# Altium PCB STM32&ESP.PcbDoc
Units mm, origin at the board's own origin, x right, y up, seen from the top; angles counter-clockwise.
Board outline 84.67 x 73.97 mm, 2 copper layers (Top Layer, Bottom Layer); 55 components, 54 nets, 237 pads, 41 vias.
Unrouted connection lines stored in the file: 4.
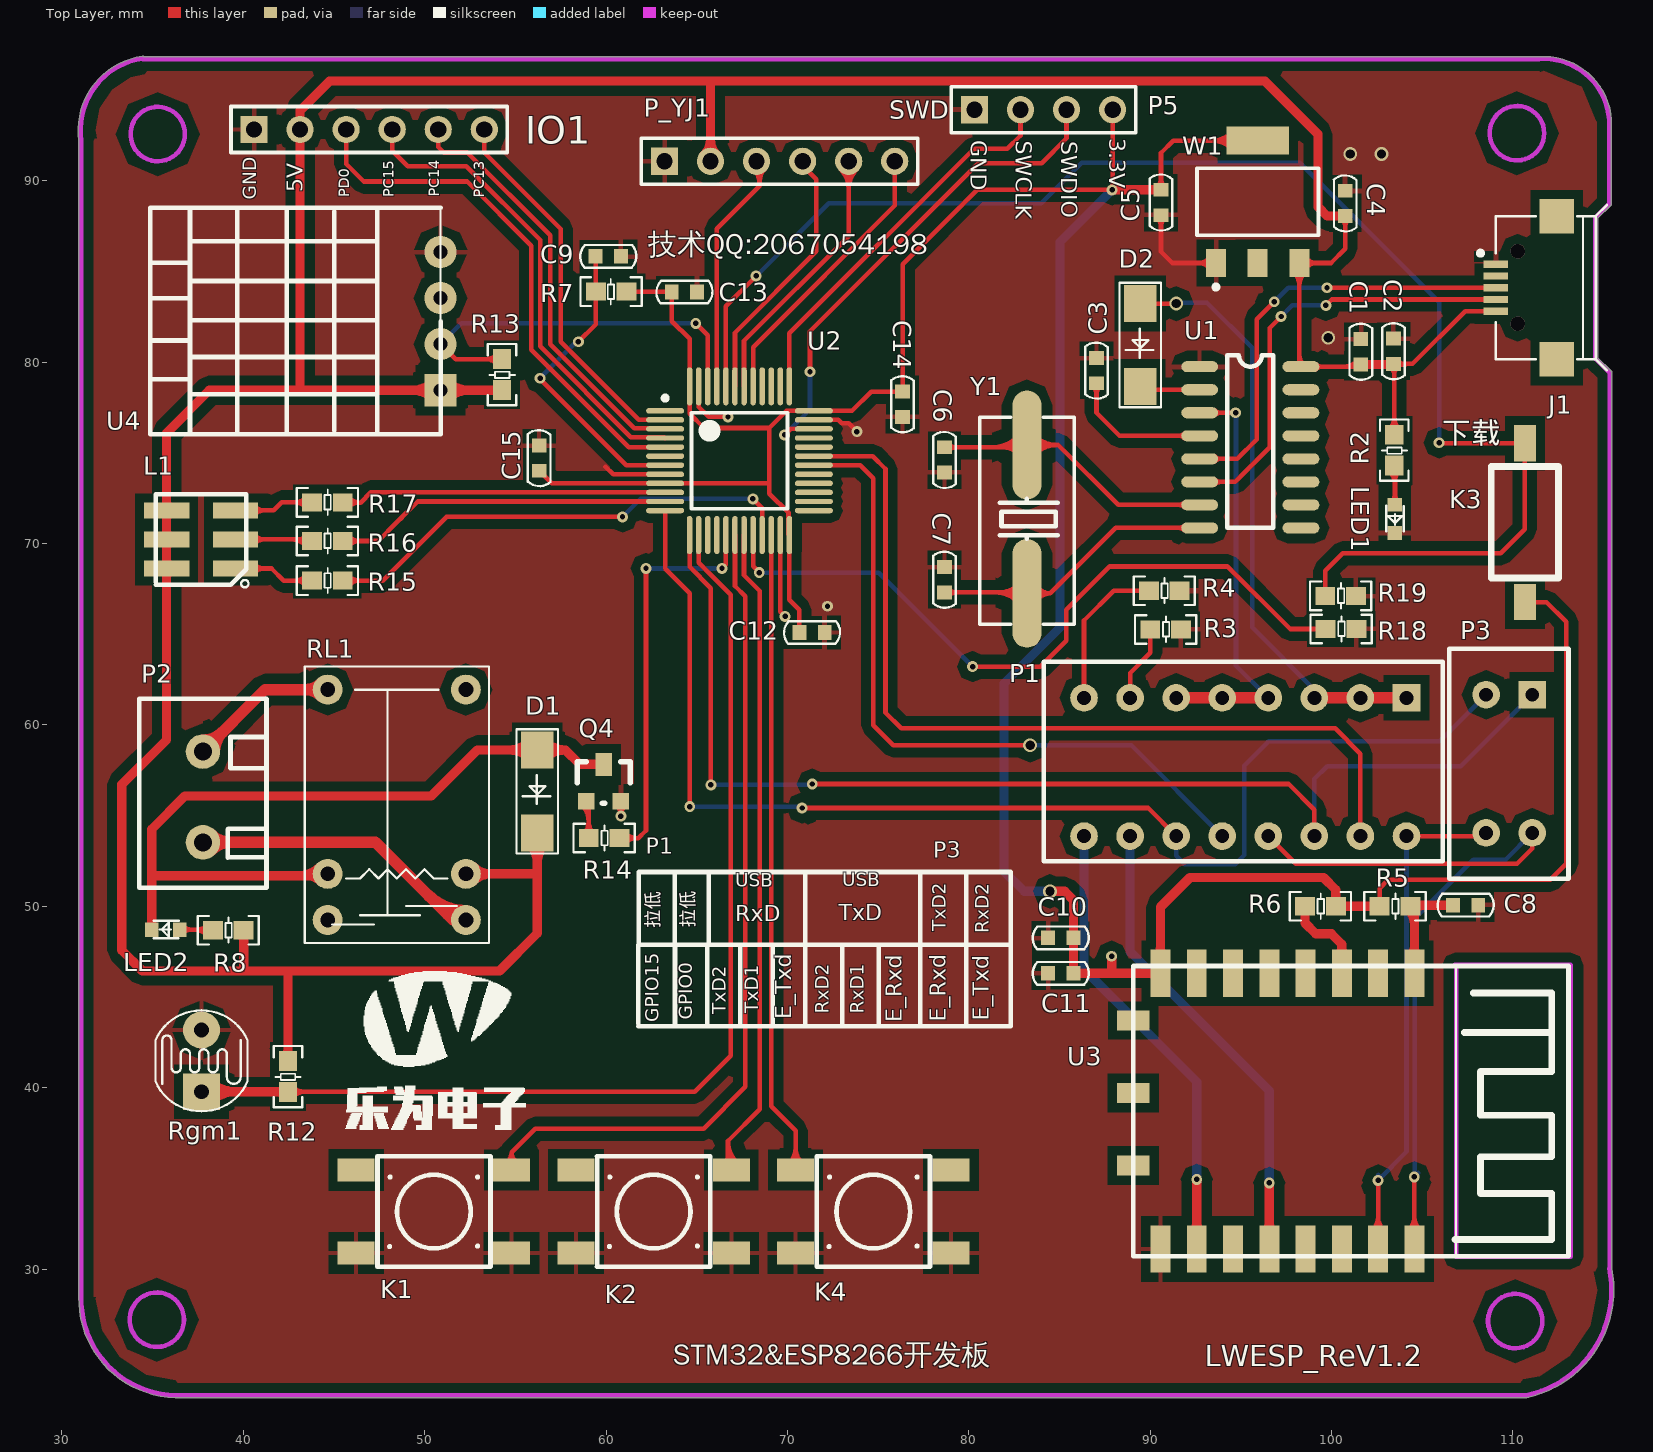
[diagram p0: Top Layer view]
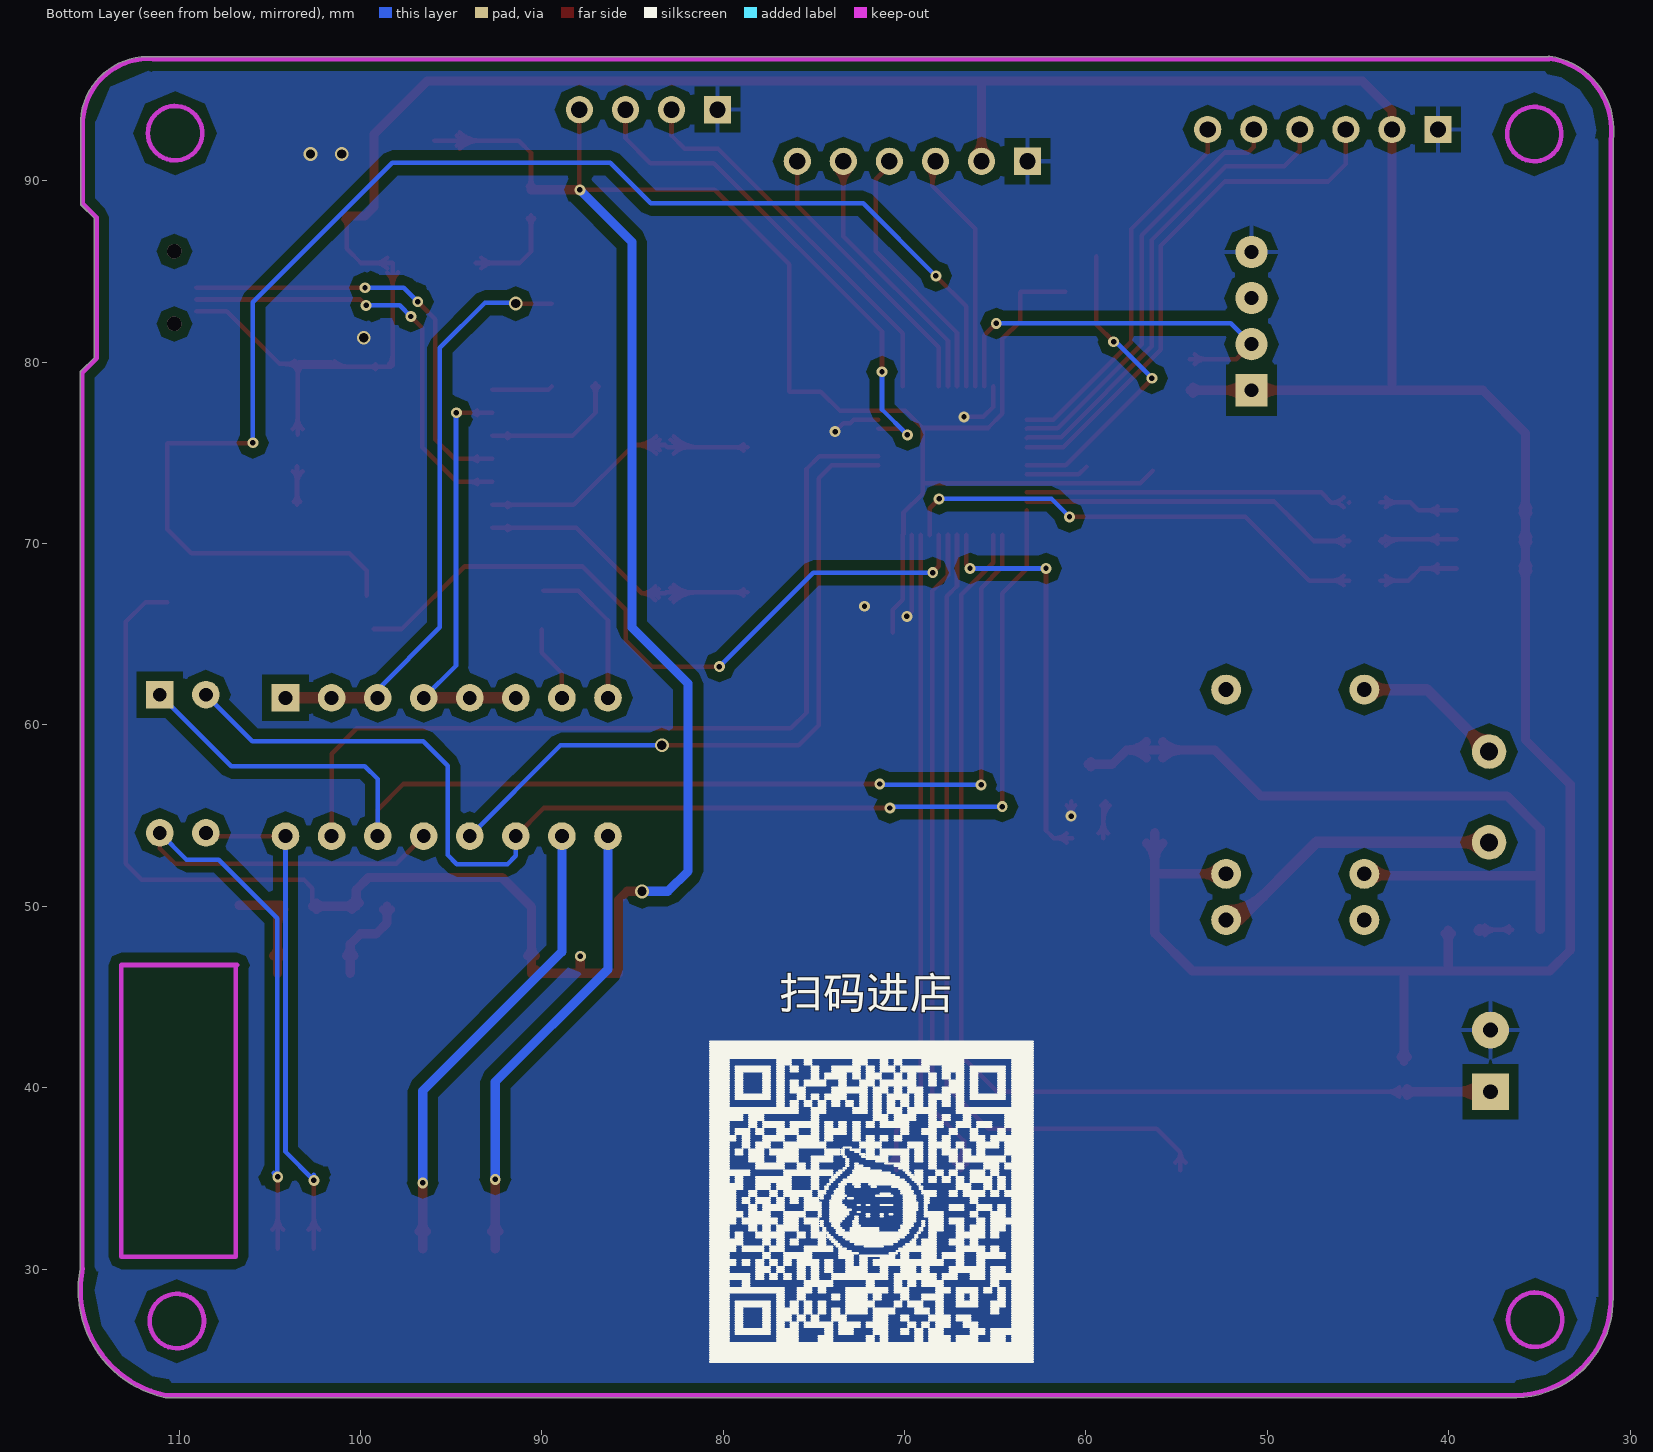
[diagram p1: Bottom Layer view, seen from below]

## Layer stack, top to bottom
Top Layer: signal copper 0.0356
Dielectric: dielectric 0.32, FR-4, Dk 4.8
Bottom Layer: signal copper 0.0356

## Board outline
36.243,22.91 ccw(c36.246,23.038) 36.246,22.91 110.744,22.91 ccw(c110.744,23.038) 110.77,22.913 ccw(c109.525,28.829) 115.57,28.829 ccw(c109.525,28.829) 115.453,30.013 ccw(c115.341,30.074) 115.469,30.074 115.469,79.426 ccw(c115.341,79.426) 115.431,79.516 114.681,80.266 114.681,87.933 115.406,88.658 115.406,88.657 ccw(c115.316,88.748) 115.443,88.748 115.443,93.37 ccw(c115.316,93.37) 115.443,93.379 ccw(c111.709,93.116) 111.451,96.851 34.519,96.851 ccw(c34.442,96.749) 34.424,96.875 ccw(c35.014,92.799) 30.937,92.218 30.937,28.475 cw(c36.373,28.346) 30.937,28.476 30.937,28.475 ccw(c36.373,28.346)

## Design rules (kind name [scope] priority, off if disabled: settings)
Clearance Clearance_1 [inpolygon] p1: gap=0.508
Clearance [All] p2: gap=0.178
ComponentClearance [All] p1 off: gap=0.254 collisioncheckmode=3 verticalgap=0.254 showdistances=FALSE
PolygonConnect PolygonConnect_1 [isvia] p1: connectstyle=Direct reliefconductorwidth=0.254 reliefentries=4 polygonreliefangle="90 Angle"
PolygonConnect [All] p2: connectstyle=Relief reliefconductorwidth=0.254 reliefentries=4 polygonreliefangle="90 Angle"
RoutingVias [All] p1: holewidth=12.7 width=12.7 viastyle="Through Hole" minholewidth=0.381 minwidth=0.762 maxholewidth=12.7 maxwidth=12.7
SilkscreenOverComponentPads [All] p1: minsilkscreentomaskgap=0.254
SolderMaskExpansion [All] p1: expansion=0.102
TestPointUsage [All] p1: valid=0 allowmultiple=FALSE
Testpoint [All] p1: side=3 testpointundercomponent=TRUE minsize=1.016 maxsize=2.54 preferedsize=1.524 minholesize=0 maxholesize=1.016 preferedholesize=0.813 testpointgrid=0.025 style=297 order=0-112345678
Width [All] p1: maxlimit=0.635 minlimit=0.203 preferedwidth=0.254
22 further rules are at their usual default settings.

## Components (designator, comment, footprint, x,y, rotation, side; value= is the part's Value field where it differs from the comment)
C1 "Cap" SC0603 101.625,81.28 r270 top
C2 "Cap" SC0603 103.429,81.305 r270 top
C3 "Cap" SC0603 87.046,78.842 r90 top
C4 "Cap" SC0603 100.762,89.459 r270 top
C5 "Cap" SC0603 90.602,88.113 r90 top
C6 "Cap" SC0603 78.664,75.311 r270 top
C7 "Cap" SC0603 78.664,67.31 r90 top
C8 "104/50V" SC0603 106.705,50.063 r0 top
C9 "104" SC0603 59.426,85.841 r0 top
C10 "104/50V" SC0603 85.776,48.26 r180 top
C11 "106/50V" SC0603 85.776,46.304 r180 top
C12 "104" SC0603 70.663,65.1 r0 top
C13 "104" SC0603 63.627,83.871 r0 top
C14 "104" SC0603 76.352,78.384 r270 top
C15 "104" SC0603 56.312,74.016 r90 top
D1 "二极管" SS12 56.21,53.924 r90 top
D2 "1N4148" SS12 89.459,78.537 r90 top
IO1 "Header 6" HDR1X6 40.589,92.837 r0 top
J1 "Micro USB" "micro usb" 112.42,88.062 r180 top
K1 "key按键" SW-T 54.254,31.14 r90 top
K2 "key按键" SW-T 66.37,31.14 r90 top
K3 "下载按键" "轻触开关 3*6*2.5mm" 112.522,68.097 r90 top
K4 "key按键" SW-T 78.486,31.14 r90 top
L1 "G5050" G5050 37.668,70.231 r90 top
LED1 "发光二级管" G0603 103.505,72.136 r270 top
LED2 "发光二级管" G0603 36.5,48.717 r180 top
P1 "拨码开关" 拨码开关 104.14,61.493 r180 top
P2 "P" KF301-2P 41.275,51.029 r90 top
P3 "拨码开关2位" 拨码开关2位 111.074,61.671 r180 top
P5 "SWD" 4P 80.315,93.929 r0 top
P_YJ1 "Header 6" HDR1X6 63.221,91.084 r0 top
Q4 "S8050" SOT-23 58.928,55.804 r0 top
R2 "2K" 0603R 103.454,74.32 r90 top
R3 "100R" 0603R 91.694,65.253 r180 top
R4 "100R" 0603R 91.618,67.386 r180 top
R5 "1K" 0603R 104.343,49.987 r180 top
R6 "1K" 0603R 100.228,49.987 r180 top
R7 "1K" 0603R 59.452,83.91 r0 top
R8 "2K" 0603R 40.005,48.666 r180 top
R12 "10K" 0603R 42.443,39.776 r90 top
R13 "1K" 0603R 54.254,78.486 r90 top
R14 "1K" 0603R 60.731,53.746 r180 top
R15 "1K" 0603R 45.466,67.945 r180 top
R16 "1K" 0603R 45.466,70.129 r180 top
R17 "1K" 0603R 45.466,72.263 r180 top
R18 "1K" 0603R 101.371,65.278 r180 top
R19 "10K" 0603R 101.346,67.107 r180 top
Rgm1 "光敏电阻" pr 37.694,41.478 r270 top
RL1 "6脚继电器" 6脚继电器 47.193,56.871 r0 top
U1 "CH340G" MAX3232 91.618,70.434 r0 top
U2 "STM32F103C8T6" LQFP-48_M 67.386,74.803 r0 top
U3 "ESP-12F" ESP12F 88.951,30.836 r270 top
U4 "DHT11" DHT11 50.876,82.271 r180 top
W1 "AMS1117_3.3" AMS1117_3.3 96.012,88.875 r0 top
Y1 "XTAL" XTAX5 83.236,75.413 r270 top

## Footprints (in the part's own frame and the unit in brackets; to place one, negate y for a bottom-side part, rotate by r counter-clockwise, add the part's x,y. Pads: shape width x height; smd on the part's side, far side on the other; paste and mask are expansions set on the pad)
4P [mm]
  rect 1.5x1.5 hole 0.9: 1(0,0)
  round 1.5 hole 0.9: 2(2.54,0) 3(5.08,0) 4(7.62,0)
  silkscreen extent -1.27,-1.27 8.89,1.27
6脚继电器 [mil]
  round 65 hole 32: 1(-100,200) 2(-100,-300) 3(200,-300) 4(200,-200) 5(-100,-200) 6(200,200)
  silkscreen extent -150,-350 250,250
0603R [mm] "Chip Resistor; Body 1.6 x 0.8 mm (LxW typ)"
  rect 1.1x1 smd: 1(-0.016,-0.014) 2(1.684,-0.014)
  silkscreen extent -0.85,-0.8 2.52,0.77
AMS1117_3.3 [mm]
  rect 1.1x1.55 smd: 1(-2.376,-3.4) 2(-0.076,-3.4) 3(2.224,-3.4)
  rect 3.45x1.55 smd: 4(-0.076,3.35)
  silkscreen extent -3.43,-4.85 3.27,1.82
DHT11 [mil]
  rect 70x70 hole 30: 1(0,150)
  round 70 hole 30: 2(0,50) 3(0,-50) 4(0,-150)
  silkscreen extent 0,-246 630,246
ESP12F [mm]
  rect 2.6x1.1 smd: 1(-15.474,15.624) 2(-15.474,13.624) 3(-15.474,11.624) 4(-15.474,9.624) 5(-15.474,7.624) 6(-15.474,5.624) 7(-15.474,3.624) 8(-15.474,1.624) 15(-0.274,1.624) 16(-0.274,3.624) 17(-0.274,5.624) 18(-0.274,7.624) 19(-0.274,9.624) 20(-0.274,11.624) 21(-0.274,13.624) 22(-0.274,15.624)
  rect 1.1x1.8 smd: 9(-12.874,0.124) 11(-8.874,0.124) 13(-4.874,0.124)
  silkscreen extent -15.87,0.12 0.13,24.12
G0603 [mm]
  rect 0.75x0.8 smd: 1(0,0) 2(1.55,0)
  silkscreen extent 0.05,-0.48 1.45,0.48
G5050 [mm]
  rect 0.9x2.5 smd: 1(-1.6,-1.9) 2(0,-1.9) 3(1.6,-1.9) 4(1.6,1.9) 5(0,1.9) 6(-1.6,1.9)
  silkscreen extent -2.64,-2.62 2.5,2.5
HDR1X6 [mm] "Connector; Header; 6 Position"
  rect 1.5x1.5 hole 0.9: 1(0,0)
  round 1.5 hole 0.9: 2(2.54,0) 3(5.08,0) 4(7.62,0) 5(10.16,0) 6(12.7,0)
  silkscreen extent -1.27,-1.27 13.97,1.27, body extent -1.27,-1.27 13.97,1.27, height 7.58
KF301-2P [mm]
  round 1.9 hole 1: 1(2.5,3.5) 2(7.5,3.5)
  silkscreen extent 0,0 10.41,7.01
LQFP-48_M [mm]
  oval 2.1x0.3 smd: 1(-4.125,2.521) 2(-4.125,2.021) 3(-4.125,1.521) 4(-4.125,1.021) 5(-4.125,0.521) 6(-4.125,0.021) 7(-4.125,-0.479) 8(-4.125,-0.979) 9(-4.125,-1.479) 10(-4.125,-1.979) 11(-4.125,-2.479) 12(-4.125,-2.979) 25(4.075,-2.979) 26(4.075,-2.479) 27(4.075,-1.979) 28(4.075,-1.479) 29(4.075,-0.979) 30(4.075,-0.479) 31(4.075,0.021) 32(4.075,0.521) 33(4.075,1.021) 34(4.075,1.521) 35(4.075,2.021) 36(4.075,2.521)
  oval 0.3x2.1 smd: 13(-2.775,-4.329) 14(-2.275,-4.329) 15(-1.775,-4.329) 16(-1.275,-4.329) 17(-0.775,-4.329) 18(-0.275,-4.329) 19(0.225,-4.329) 20(0.725,-4.329) 21(1.225,-4.329) 22(1.725,-4.329) 23(2.225,-4.329) 24(2.725,-4.329) 37(2.725,3.871) 38(2.225,3.871) 39(1.725,3.871) 40(1.225,3.871) 41(0.725,3.871) 42(0.225,3.871) 43(-0.275,3.871) 44(-0.775,3.871) 45(-1.275,3.871) 46(-1.775,3.871) 47(-2.275,3.871) 48(-2.775,3.871)
  silkscreen extent -4.25,-2.88 2.62,3.35, body extent -3.53,-3.73 3.47,3.27, height 1.6
MAX3232 [mil]
  oval 80x24 smd: 1(44,367) 2(44,317) 3(44,267) 4(44,217) 5(44,167) 6(44,117) 7(44,67) 8(44,17) 9(264,17) 10(264,67) 11(264,117) 12(264,167) 13(264,217) 14(264,267) 15(264,317) 16(264,367)
  silkscreen extent 104,17 204,392
"micro usb" [mm]
  rect 1.35x0.4 smd: 1(3.358,5.25) 2(3.358,4.6) 3(3.358,3.95) 4(3.358,3.3) 5(3.358,2.65)
  rect 1.9x1.9 smd: ""(0,7.9) ""(0,0)
  silkscreen extent -2.78,-0.62 4.32,8.52
pr [mil]
  rect 80x80 hole 32: 1(66.93,0)
  round 80 hole 32: 2(-66.93,0)
  silkscreen extent -110,-100 110,100
SC0603 [mil]
  rect 30x32 smd: 1(0,0) 2(55,0)
  silkscreen extent -33,-25 88,25
SOT-23 [mil]
  rect 36x36 smd: 1(-0.46,-0.15) 2(74.54,-0.15)
  rect 36x50 smd: 3(37.54,79.85)
  silkscreen extent -20,-5 95,85
SS12 [mil]
  rect 80x70 smd: 1(185,0) 2(5,0)
  silkscreen extent -40,-45 230,45, body extent -6,-50 175,56, height 94
SW-T [mil]
  rect 50x80 smd: 1(-10.2,316.23) 1(-10.2,-21.27) 2(169.8,316.23) 2(169.8,-21.27)
  silkscreen extent -40,24 200,270
XTAX5 [mm]
  oval 6x1.6 smd: 1(8.153,-0.025) 2(-0.025,-0.025)
  silkscreen extent -1.55,-2.63 9.85,2.57, body extent -1.53,-2.34 9.82,2.31, height 3.5
拨码开关 [mil]
  rect 60x60 hole 30: 1(0,0)
  round 60 hole 30: 2(100,0) 3(200,0) 4(300,0) 5(400,0) 6(500,0) 7(600,0) 8(700,0) 9(700,300) 10(600,300) 11(500,300) 12(400,300) 13(300,300) 14(200,300) 15(100,300) 16(0,300)
  silkscreen extent -79,-79 787,354
拨码开关2位 [mil]
  rect 60x60 hole 30: 1(0,0)
  round 60 hole 30: 2(100,0) 3(0,300) 4(100,300)
  silkscreen extent -79,-100 180,400
"轻触开关 3*6*2.5mm" [mm]
  rect 2x1.2 smd: 1(-1.321,1.85) 2(7.442,1.85)
  silkscreen extent 0,0 6.15,3.71

## Part data
C1 C2 C3 C4 C5 C6 C7: "Capacitor"
C8 C10 C11: library part "Cap Semi", "Capacitor (Semiconductor SIM Model)"
C9 C12 C13 C14 C15: library part CAP, "Capacitor"
D2: library part 二极管
IO1 P_YJ1: "Header, 6-Pin"
K3: library part key按键
P2: library part 2P
P5: library part 4P
Q4: library part 三极管3
R2 R8: library part 电阻R
R3 R4 R5 R6 R12 R14 R15 R16 R17 R18 R19: library part RES0.2
R7 R13: library part RES0.4
Rgm1: library part Res-Sen
U2: library part stc15f2k60s2(32脚)
Y1: "Crystal Oscillator"

## Via types
v1: diameter 0.6, hole 0.3, Top Layer to Bottom Layer, 33 vias
v2: diameter 0.762, hole 0.508, Top Layer to Bottom Layer, 6 vias
v3: diameter 0.8, hole 0.8, Top Layer to Bottom Layer, 2 vias

## Nets (pads, with @x,y where several pads share a name; then routed paths per layer and width w, separated by ;. In a path a pad name is that pad's centre, name@x,y a point inside that pad or via, vN(x,y) a via of type N, cw(c..) or ccw(c..) an arc to the next point about the centre after c; other vN are vias at no path point)
3.3V: C5.2 C10.1 C11.1 C12.1 C13.1 C14.1 C15.1 K3.1 P5.4 R5.2 R6.1 R7.2 U2.9 U2.24 U2.36 U2.48 U3.8 W1.2 W1.4 | length 192.3
  Top Layer w0.254: C15.1 57.003,73.324 U2.9 69.006,73.324 69.012,73.33 ; R7.2 63.602,83.896 C13.1 63.627,82.271 64.611,81.287 U2.48 64.616,78.67 64.616,77.167 65.405,76.378 69.012,76.378 ; C12.1 70.663,66.345 70.111,66.897 U2.24 70.066,70.52 70.066,71.692 69.012,72.746 69.012,73.33 ; P5.4 87.935,89.535 v1(87.909,89.51) 80.467,89.51 76.352,85.395 C14.1 74.625,78.384 73.565,77.324 U2.36 71.456,77.32 69.954,77.32 69.012,76.378 ; C5.2@90.422,89.689 ccw(c89.989,90.123) 90.602,90.123 ccw(c91.215,90.123) C5.2@90.781,89.689 ; C5.2 90.602,91.542 91.284,92.224 W1.4 ; W1.4@94.528,91.766 ccw(c93.421,90.66) 93.421,92.224 ccw(c93.421,93.789) W1.4@94.528,92.682 ; W1.4@94.707,91.946 ccw(c94.035,91.273) 94.035,92.224 ccw(c94.035,93.175) W1.4@94.707,92.503 ; R5.2 102.659,50.995 103.124,51.46 112.065,51.46 112.954,52.349 112.954,65.684 111.862,66.777 K3.1 ; 69.012,73.33 69.012,76.378
  Top Layer w0.508: v2(84.48,50.825) 85.293,50.825 85.776,50.343 C10.1 C11.1 87.884,46.304 ; v1(87.884,47.244) 87.884,46.304 ; v1(87.909,89.51) C5.2 ; 89.847,46.304 ccw(c89.847,47.037) U3.8@90.365,46.519 ; 89.873,46.304 cw(c89.873,45.608) U3.8@90.365,46.1 ; U3.8@90.365,47.269 ccw(c89.86,47.774) 90.575,47.774 ccw(c91.289,47.774) U3.8@90.784,47.269 ; R6.1@100.07,50.175 ccw(c99.65,50.595) 100.244,50.595 ccw(c100.838,50.595) R6.1@100.418,50.175 ; R6.1@100.468,49.827 cw(c100.888,49.408) 100.888,50.001 cw(c100.888,50.595) R6.1@100.468,50.175 ; R5.2@102.435,49.827 ccw(c102.015,49.408) 102.015,50.001 ccw(c102.015,50.595) R5.2@102.435,50.175 ; R5.2 R6.1 100.244,50.911 99.568,51.587 92.202,51.587 90.575,49.96 U3.8 90.569,46.304 87.884,46.304
  Bottom Layer w0.508: v2(84.48,50.825) 83.058,50.825 81.94,51.943 81.94,62.281 85.039,65.38 85.039,86.639 v1(87.909,89.51) ; v1(87.884,47.244) v1@87.909,47.269
5V: C1.2 C2.2 C4.2 D1.2 IO1.2 J1.1 L1.4 L1.5 L1.6 P_YJ1.2 R2.2 R8.1 R12.2 R13.1 RL1.4 U1.16 U4.1 W1.3 | length 227.6
  Top Layer w0.254: W1.3@97.937,84.95 cw(c97.215,84.228) 98.236,84.228 cw(c99.257,84.228) W1.3@98.535,84.95 ; 98.236,80.397 ccw(c98.964,80.397) U1.16@98.449,79.882 ; W1.3@98.535,85.175 cw(c99.257,84.453) 99.257,85.474 cw(c99.257,86.495) W1.3@98.535,85.773 ; U1.16@99.16,79.63 cw(c99.464,79.327) 99.464,79.756 cw(c99.464,80.185) U1.16@99.16,79.882 ; C4.2@100.582,87.882 cw(c100.149,87.449) 100.762,87.449 cw(c101.375,87.449) C4.2@100.941,87.882 ; 100.68,79.756 ccw(c100.68,80.803) C1.2@101.42,80.063 ; C4.2 100.762,86.258 99.978,85.474 W1.3 98.236,79.844 U1.16 C1.2@101.498,79.756 ; R2.2@103.205,76.319 ccw(c102.568,76.955) 103.468,76.955 ccw(c104.369,76.955) R2.2@103.732,76.319 ; C2.2@103.275,79.729 cw(c102.807,79.261) 103.468,79.261 ; C2.2@103.454,79.883 C2.2 104.47,79.908 107.374,82.812 J1.1 ; R2.2 C2.2@103.468,79.869 ; 103.468,79.329 cw(c104.033,79.329) 103.634,79.729 cw(c104.006,79.357) 104.006,79.883 ; C2.2@103.634,80.088 ccw(c104.129,80.583) 104.129,79.883
  Top Layer w0.508: L1.6@35.63,68.492 cw(c35.295,68.158) 35.768,68.158 cw(c36.241,68.158) L1.6@35.907,68.492 ; L1.6@35.63,68.77 ccw(c35.295,69.104) 35.768,69.104 ccw(c36.241,69.104) L1.6@35.907,68.77 ; L1.5@35.63,70.092 cw(c35.295,69.758) 35.768,69.758 cw(c36.241,69.758) L1.5@35.907,70.092 ; L1.5@35.63,70.37 ccw(c35.295,70.704) 35.768,70.704 ccw(c36.241,70.704) L1.5@35.907,70.37 ; L1.4@35.63,71.692 cw(c35.295,71.358) 35.768,71.358 cw(c36.241,71.358) L1.4@35.907,71.692 ; L1.4@35.63,71.97 ccw(c35.295,72.304) 35.768,72.304 ccw(c36.241,72.304) L1.4@35.907,71.97 ; R8.1@39.847,48.507 cw(c39.427,48.087) 40.021,48.087 cw(c40.614,48.087) R8.1@40.195,48.507 ; R8.1 40.021,46.472 39.98,46.431 ; R12.2@42.284,41.685 ccw(c41.864,42.105) 42.458,42.105 ccw(c43.051,42.105) R12.2@42.632,41.685 ; R12.2 42.458,46.431 ; U4.1@50.427,78.012 ccw(c49.343,76.928) 49.343,78.461 ccw(c49.343,79.994) U4.1@50.427,78.91 ; U4.1@51.325,78.012 cw(c52.409,76.928) 52.409,78.461 cw(c52.409,79.994) U4.1@51.325,78.91 ; RL1.4 56.083,51.791 ; RL1.4@52.677,51.386 cw(c53.653,50.411) 53.653,51.791 cw(c53.653,53.17) RL1.4@52.677,52.195 ; 53.651,78.461 ccw(c53.651,79.088) R13.1@54.095,78.644 ; 53.698,78.461 cw(c53.698,77.9) R13.1@54.095,78.296 ; R13.1 54.259,78.461 U4.1 43.053,78.461 ; D1.2@55.761,53.475 cw(c54.677,52.391) 56.21,52.391 cw(c57.743,52.391) D1.2@56.659,53.475 ; D1.2 56.21,48.514 54.127,46.431 42.458,46.431 ; P_YJ1.2@65.41,91.435 ccw(c64.563,92.282) 65.761,92.282 ccw(c66.958,92.282) P_YJ1.2@66.111,91.435 ; P_YJ1.2 65.761,95.453 ; C4.2 99.771,88.062 99.263,88.57 99.263,92.583 96.342,95.504 44.755,95.504 43.129,93.878 IO1.2 43.129,78.537 43.053,78.461 ; C1.2 C2.2@103.403,79.883 ; 39.98,46.431 34.442,46.431 33.299,47.574 33.299,56.718 35.768,59.187 L1.6 L1.5 L1.4 35.768,76.103 38.125,78.461 43.053,78.461 ; 39.98,46.431 42.458,46.431
AD_GM: R12.1 Rgm1.1 U2.14 | length 64.7
  Top Layer w0.254: R12.1 42.475,39.778 64.899,39.778 66.878,41.757 66.878,67.183 65.111,68.95 U2.14 ; R12.1@42.721,39.497 cw(c43.4,38.818) 43.4,39.778 ; R12.1@42.721,40.025 ccw(c43.316,40.619) 43.316,39.778
  Top Layer w0.508: Rgm1.1 42.44,39.778 R12.1 ; Rgm1.1@38.232,39.239 cw(c39.533,37.939) 39.533,39.778 cw(c39.533,41.618) Rgm1.1@38.232,40.317 ; 41.822,39.778 cw(c41.822,39.125) R12.1@42.284,39.587 ; 41.906,39.778 ccw(c41.906,40.313) R12.1@42.284,39.935
D+: J1.3 U1.5 | length 26.7
  Top Layer w0.254: U1.5 94.818,74.676 95.885,75.743 95.885,82.372 v1(96.85,83.337) ; U1.5@93.572,74.55 cw(c93.876,74.247) 93.876,74.676 cw(c93.876,75.105) U1.5@93.572,74.802 ; v1@96.723,83.337 cw(c96.417,83.337) 96.633,83.121 cw(c96.85,82.904) v1@96.85,83.21 ; v1(99.758,84.112) J1.3 ; v1@99.848,84.022 cw(c100.065,83.805) 100.065,84.112 cw(c100.065,84.418) v1@99.848,84.202
  Bottom Layer w0.254: v1(96.85,83.337) 97.625,84.112 v1(99.758,84.112) ; v1@96.85,83.464 ccw(c96.85,83.771) 97.067,83.554 ccw(c97.284,83.337) v1@96.977,83.337 ; v1@99.668,84.022 ccw(c99.452,83.805) 99.452,84.112 ccw(c99.452,84.418) v1@99.668,84.202
D-: J1.2 U1.6 | length 26.5
  Top Layer w0.254: U1.6 94.691,73.406 96.596,75.311 96.596,81.89 v1(97.231,82.525) ; U1.6@93.572,73.28 cw(c93.876,72.977) 93.876,73.406 cw(c93.876,73.835) U1.6@93.572,73.532 ; v1@97.104,82.525 cw(c96.798,82.525) 97.014,82.308 cw(c97.231,82.091) v1@97.231,82.398 ; v1(99.695,83.134) 100.023,83.462 J1.2
  Bottom Layer w0.254: v1(97.231,82.525) 97.841,83.134 v1(99.695,83.134) ; v1@97.231,82.652 ccw(c97.231,82.958) 97.448,82.741 ccw(c97.665,82.525) v1@97.358,82.525 ; v1@99.605,83.044 ccw(c99.388,82.828) 99.388,83.134 ccw(c99.388,83.441) v1@99.605,83.224
ESP_RXD: P1.16 P3.4 U3.21 | length 30.4
  Top Layer w0.254: U3.21@102.276,32.159 ccw(c101.554,32.881) 102.575,32.881 ccw(c103.596,32.881) U3.21@102.874,32.159 ; v1@102.485,34.8 cw(c102.268,34.583) 102.575,34.583 cw(c102.881,34.583) v1@102.665,34.8 ; U3.21 v1(102.575,34.89) ; P1.16 108.356,53.873 P3.4
  Bottom Layer w0.254: v1@102.485,34.98 ccw(c102.268,35.197) 102.575,35.197 ccw(c102.881,35.197) v1@102.665,34.98 ; v1(102.575,34.89) 104.14,36.455 P1.16
ESP_TXD: P1.13 P3.3 U3.22 | length 45.6
  Top Layer w0.254: P1.13 98.044,52.349 110.236,52.349 111.074,53.188 P3.3 ; U3.22@104.276,32.159 ccw(c103.554,32.881) 104.575,32.881 ccw(c105.596,32.881) U3.22@104.874,32.159 ; v1@104.482,34.988 cw(c104.258,34.764) 104.575,34.764 ; U3.22 v1@104.575,35.074 ; v1@104.575,34.778 cw(c104.871,34.778) v1@104.662,34.988
  Bottom Layer w0.254: v1(104.572,35.077) 104.597,35.103 104.597,49.352 107.823,52.578 109.601,52.578 P3.3 ; v1@104.572,35.204 ccw(c104.572,35.511) 104.789,35.294 ccw(c105.005,35.077) v1@104.699,35.077
GND: C1.1 C2.1 C3.2 C4.1 C5.1 C6.2 C7.2 C8.2 C9.2 C10.2 C11.2 C12.2 C13.2 C14.2 C15.2 IO1.1 J1.5 K1.1 K2.1 K4.1 LED1.2 P5.1 P_YJ1.1 Q4.2 R3.1 R4.1 R18.1 R19.1 Rgm1.2 U1.1 U2.8 U2.23 U2.35 U2.47 U3.15 U4.4 W1.1 | length 24.1
  Top Layer w0.254: 59.969,74.244 60.389,73.824 U2.8 ; Q4.2@60.588,55.567 cw(c60.024,55.003) 60.821,55.003 cw(c61.619,55.003) Q4.2@61.055,55.567 ; v1@60.732,55.067 ccw(c60.515,55.284) 60.821,55.284 ccw(c61.128,55.284) v1@60.911,55.067 ; v1(60.821,54.977) Q4.2 ; U2.47 65.111,77.536 65.659,76.987 v1(66.726,76.987) ; U2.23 69.611,66.254 v1(69.875,65.989) ; U2.35 72.808,76.824 72.995,76.637 73.375,76.637 v1(73.838,76.175) ; C5.1@90.422,87.933 cw(c89.989,87.499) 90.602,87.499 cw(c91.215,87.499) C5.1@90.781,87.933 ; C5.1 90.602,86.106 91.234,85.474 W1.1 ; W1.1@93.337,85.175 ccw(c92.615,84.453) 92.615,85.474 ccw(c92.615,86.495) W1.1@93.337,85.773
  other v1: 72.212,66.548
  other v2: 99.822,81.356 101.041,91.491 102.768,91.491
GPIO15: P1.9 U3.16 | length 26.5
  Top Layer w0.508: U3.16@92.366,32.069 ccw(c91.86,32.574) 92.575,32.574 ccw(c93.289,32.574) U3.16@92.784,32.069 ; U3.16 v1(92.575,34.942)
  Bottom Layer w0.508: P1.9 86.36,46.533 92.575,40.318 v1(92.575,34.942)
"GPIO 0": P1.10 U3.18 | length 27.1
  Top Layer w0.508: U3.18@96.366,32.069 ccw(c95.86,32.574) 96.575,32.574 ccw(c97.289,32.574) U3.18@96.784,32.069 ; U3.18 v1(96.575,34.751)
  Bottom Layer w0.508: P1.10 88.9,47.498 96.575,39.823 v1(96.575,34.751)
KEY1: K1.2 U2.18 | length 48.2
  Top Layer w0.254: K1.2@54.503,35.869 ccw(c54.109,36.43) 54.795,36.43 ; K1.2@54.795,35.453 54.795,36.43 ; K1.2@55.086,35.869 cw(c55.48,36.43) 54.795,36.43 ; U2.18 67.111,67.662 67.678,67.094 67.678,65.1 ; 67.678,65.913 67.678,65.1 ; 54.795,36.43 56.109,37.744 65.38,37.744 67.678,40.043 67.678,65.1
KEY2: K2.2 U2.19 | length 39
  Top Layer w0.254: K2.2@66.551,35.813 ccw(c66.13,36.234) 66.726,36.234 ; 66.726,36.47 ccw(c67.869,36.47) K2.2@67.085,35.638 ; K2.2@66.91,35.453 66.726,35.638 66.726,37.059 ; K2.2@67.259,35.823 cw(c68.424,37.059) 66.726,37.059 ; U2.19 67.611,68.254 68.478,67.387 68.478,38.811 66.726,37.059
KEY4: K4.2 U2.22 | length 37.5
  Top Layer w0.254: U2.22 69.111,38.966 70.454,37.623 K4.2@70.454,35.453 ; K4.2@70.095,35.813 ccw(c69.227,36.68) 70.454,36.68 ccw(c71.68,36.68) K4.2@70.813,35.813
LED_B: R17.1 U2.10 | length 18.5
  Top Layer w0.254: R17.1 R17.1@45.496,72.263 ; R17.1@45.795,72.013 cw(c46.398,71.411) 46.398,72.263 ; R17.1@45.795,72.541 ccw(c46.466,73.212) 46.466,72.263 47.028,72.824 U2.10
LED_G: R16.1 U2.11 | length 20.5
  Top Layer w0.254: R16.1 47.436,70.144 48.463,71.171 ; R16.1@45.795,69.88 cw(c46.432,69.243) 46.432,70.144 cw(c46.432,71.044) R16.1@45.795,70.407 ; 48.755,71.463 48.463,71.171 ; U2.11 49.617,72.324 48.463,71.171
LED_R: R15.1 U2.21 | length 28.1
  Top Layer w0.254: R15.1 47.69,67.959 51.206,71.476 v1(60.909,71.476) ; R15.1@45.795,67.695 cw(c46.432,67.059) 46.432,67.959 cw(c46.432,68.86) R15.1@45.795,68.223 ; v1(68.097,72.466) 68.611,71.953 U2.21
  Bottom Layer w0.254: v1(60.909,71.476) 61.9,72.466 v1(68.097,72.466)
NetC3_1: C3.1 U1.4 | length 9.5
  Top Layer w0.254: C3.1@86.866,78.662 cw(c86.433,78.228) 87.046,78.228 cw(c87.659,78.228) C3.1@87.225,78.662 ; C3.1 87.046,77.216 88.316,75.946 U1.4 ; U1.4@91.898,75.82 ccw(c91.595,75.517) 91.595,75.946 ccw(c91.595,76.375) U1.4@91.898,76.072
NetC8_1: C8.1 R5.1 U3.1 | length 8.5
  Top Layer w0.508: R5.1@104.235,49.827 cw(c103.414,49.007) 104.575,49.007 ; R5.1 104.421,50.063 C8.1 ; U3.1@104.366,47.269 ccw(c103.86,47.774) 104.575,47.774 ccw(c105.289,47.774) U3.1@104.784,47.269 ; U3.1 R5.1@104.575,49.785 ; R5.1@104.583,49.827 cw(c105.152,49.258) 105.152,50.063
NetD1_1: D1.1 LED2.2 Q4.3 RL1.5 | length 50.4
  Top Layer w0.508: LED2.2 34.95,52.045 ; 34.95,51.689 34.95,54.254 36.779,56.083 50.368,56.083 52.908,58.623 D1.1 57.76,58.623 58.551,57.832 Q4.3 ; 34.975,51.689 36.093,51.689 44.552,51.689 RL1.5 ; 43.028,51.689 ccw(c43.028,53.416) RL1.5@44.249,52.195 ; 43.519,51.689 cw(c43.519,50.656) RL1.5@44.249,51.386 ; D1.1@55.761,58.174 ccw(c54.677,57.09) 54.677,58.623 ccw(c54.677,60.156) D1.1@55.761,59.072 ; D1.1@56.659,58.174 cw(c57.743,57.09) 57.743,58.623 cw(c57.743,60.156) D1.1@56.659,59.072 ; Q4.3@59.738,57.688 ccw(c59.391,57.341) 59.391,57.832 ccw(c59.391,58.323) Q4.3@59.738,57.976
NetD2_2: D2.2 U1.2 | length 3.4
  Top Layer w0.254: D2.2 89.637,78.486 U1.2
NetK3_2: K3.2 R19.2 U2.44 | length 80.8
  Top Layer w0.254: U2.44 66.611,83.095 v1(68.275,84.76) ; R19.2 99.662,68.496 100.635,69.469 109.347,69.469 110.672,70.794 K3.2 105.969,75.54 v1(105.943,75.565)
  Bottom Layer w0.254: v1(68.275,84.76) 72.288,88.773 83.998,88.773 86.233,91.008 98.247,91.008 105.943,83.312 v1(105.943,75.565)
NetL1_1: L1.1 R15.2 | length 7.1
  Top Layer w0.254: L1.1 41.554,68.631 42.226,67.959 R15.2 ; L1.1@40.597,68.403 cw(c41.148,67.851) 41.148,68.631 cw(c41.148,69.411) L1.1@40.597,68.859 ; R15.2@43.468,67.695 ccw(c42.831,67.059) 42.831,67.959 ccw(c42.831,68.86) R15.2@43.468,68.223
NetL1_2: L1.2 R16.2 | length 7.3
  Top Layer w0.254: L1.2 43.694,70.231 R16.2 ; L1.2@40.597,70.003 cw(c41.148,69.451) 41.148,70.231 cw(c41.148,71.011) L1.2@40.597,70.459 ; 42.62,70.231 cw(c42.62,69.032) R16.2@43.468,69.88 ; 43.042,70.231 ccw(c43.042,70.833) R16.2@43.468,70.407 ; R16.2@43.233,70.231 cw(c43.233,69.645) R16.2@43.647,70.059
NetL1_3: L1.3 R17.2 | length 7
  Top Layer w0.254: L1.3 41.681,71.831 42.127,72.277 R17.2 ; L1.3@40.597,71.603 cw(c41.148,71.051) 41.148,71.831 cw(c41.148,72.611) L1.3@40.597,72.059 ; R17.2@43.468,72.013 ccw(c42.831,71.377) 42.831,72.277 ccw(c42.831,73.178) R17.2@43.468,72.541
NetLED1_1: LED1.1 R2.1 | length 4.5
  Top Layer w0.254: R2.1@103.205,73.991 cw(c102.48,73.266) 103.505,73.266 ; LED1.1@103.33,72.311 ccw(c102.906,72.735) 103.505,72.735 ccw(c104.104,72.735) LED1.1@103.68,72.311 ; LED1.1 R2.1@103.505,74.268 ; 103.505,73.443 cw(c104.281,73.443) R2.1@103.732,73.991
NetLED2_1: LED2.1 R8.2 | length 4.2
  Top Layer w0.254: LED2.1 R8.2@38.284,48.717 ; LED2.1@36.675,48.542 cw(c37.099,48.118) 37.099,48.717 cw(c37.099,49.316) LED2.1@36.675,48.893 ; 37.282,48.717 cw(c37.282,47.692) R8.2@38.007,48.417 ; 37.458,48.717 ccw(c37.458,49.493) R8.2@38.007,48.944
  Top Layer w0.635: R8.2@38.284,48.717 R8.2
NetP1_7: P1.7 R3.2 | length 4.2
  Top Layer w0.254: P1.7 88.9,62.865 90.01,63.975 R3.2
NetP1_8: P1.8 R4.2 | length 8.5
  Top Layer w0.254: P1.8 86.36,65.761 88,67.4 R4.2
NetP2_1: P2.1 RL1.3 | length 22.1
  Top Layer w0.635: P2.1 47.284,53.529 51.562,49.251 RL1.3 ; P2.1@38.222,53.081 cw(c39.302,52.002) 39.302,53.529 cw(c39.302,55.056) P2.1@38.222,53.976 ; 50.192,50.621 ccw(c52.273,52.702) RL1.3@52.273,49.759 ; 51.276,49.537 ccw(c52.273,50.534) RL1.3@52.273,49.124
NetP2_2: P2.2 RL1.1 | length 12.6
  Top Layer w0.635: P2.2 41.197,61.951 RL1.1 ; P2.2@37.775,59.161 ccw(c37.775,60.688) 38.855,59.608 ccw(c39.934,58.529) P2.2@38.407,58.529 ; RL1.1@44.294,61.591 ccw(c43.427,60.724) 43.427,61.951 ccw(c43.427,63.177) RL1.1@44.294,62.31
NetQ4_1: Q4.1 R14.2 | length 5.3
  Top Layer w0.254: Q4.1@58.683,55.567 cw(c57.804,54.688) 59.047,54.688 ; R14.2@58.783,54.024 ccw(c58.147,54.661) 59.047,54.661 ccw(c59.948,54.661) R14.2@59.311,54.024 ; Q4.1@58.863,55.746 cw(c58.417,55.301) 59.047,55.301 ; Q4.1 59.047,55.669 R14.2 ; 59.047,55.318 cw(c59.398,55.318) Q4.1@59.15,55.567
NetR6_2: R6.2 U3.3 | length 7.1
  Top Layer w0.508: R6.2@98.37,49.827 cw(c97.95,49.408) 98.544,49.408 cw(c99.138,49.408) R6.2@98.718,49.827 ; R6.2 98.544,49.081 99.136,48.489 100,48.489 100.575,47.914 U3.3 ; U3.3@100.366,47.269 ccw(c99.86,47.774) 100.575,47.774 ccw(c101.289,47.774) U3.3@100.784,47.269
NetR18_2: R18.2 U2.20 | length 46.4
  Top Layer w0.254: U2.20 68.111,68.744 v1(68.453,68.402) ; v1(80.213,63.221) 83.947,63.221 85.369,64.643 85.369,66.345 87.757,68.732 94.285,68.732 ; 87.782,68.758 94.259,68.758 94.285,68.732 ; R18.2@99.274,65.292 97.725,65.292 94.285,68.732
  Bottom Layer w0.254: v1(68.453,68.402) 75.032,68.402 v1(80.213,63.221)
OSC1: C7.1 U1.8 Y1.1 | length 24.2
  Top Layer w0.254: C7.1 83.16,67.31 Y1.1 84.506,67.259 ; C7.1@78.869,67.13 cw(c79.302,66.697) 79.302,67.31 cw(c79.302,67.923) C7.1@78.869,67.49 ; 81.463,67.31 cw(c81.463,65.512) Y1.1@82.735,66.783 ; 81.708,67.31 ccw(c81.708,68.761) Y1.1@82.735,67.735 ; 82.076,67.31 cw(c82.076,66.125) Y1.1@82.914,66.963 ; 82.321,67.31 ccw(c82.321,68.148) Y1.1@82.914,67.555 ; Y1.1@83.553,67.018 cw(c84.017,66.693) 84.017,67.259 cw(c84.017,67.826) Y1.1@83.553,67.5 ; Y1.1@83.761,66.872 cw(c84.506,66.349) 84.506,67.259 ; Y1.1@83.761,67.646 ccw(c84.506,68.169) 84.506,67.259 ; U1.8@91.898,70.74 ccw(c91.595,70.437) 91.595,70.866 ccw(c91.595,71.295) U1.8@91.898,70.992 ; U1.8 88.113,70.866 84.506,67.259
OSC2: C6.1 U1.7 Y1.2 | length 25
  Top Layer w0.254: C6.1 83.083,75.311 Y1.2 84.938,75.438 88.24,72.136 U1.7 ; C6.1@78.869,75.131 cw(c79.302,74.698) 79.302,75.311 cw(c79.302,75.924) C6.1@78.869,75.491 ; 81.279,75.311 ccw(c81.279,77.369) Y1.2@82.735,75.914 ; Y1.2@82.735,74.962 ccw(c81.892,74.12) 81.892,75.311 ccw(c81.892,76.756) Y1.2@82.914,75.734 ; Y1.2@83.507,75.142 cw(c84.222,74.426) 84.222,75.438 cw(c84.222,76.45) Y1.2@83.507,75.734 ; Y1.2@83.686,74.962 cw(c84.835,73.813) 84.835,75.438 cw(c84.835,77.063) Y1.2@83.686,75.914 ; U1.7@91.898,72.01 ccw(c91.595,71.707) 91.595,72.136 ccw(c91.595,72.565) U1.7@91.898,72.262
PC13: IO1.6 U2.2 | length 21
  Top Layer w0.254: IO1.6 53.289,91.567 57.506,87.351 57.506,81.128 61.809,76.824 U2.2
PC14: IO1.5 U2.3 | length 23.4
  Top Layer w0.254: IO1.5 50.749,91.872 51.054,91.567 52.349,91.567 56.921,86.995 56.921,81.001 61.552,76.37 63.216,76.37 U2.3
PC15: IO1.4 U2.4 | length 26.2
  Top Layer w0.254: IO1.4 48.209,91.669 49.073,90.805 52.299,90.805 56.363,86.741 56.363,80.874 61.367,75.87 63.216,75.87 U2.4
PD0: IO1.3 U2.5 | length 29.3
  Top Layer w0.254: IO1.3 45.669,90.932 46.634,89.967 52.349,89.967 55.88,86.436 55.88,80.696 61.251,75.324 U2.5
RELAY: R14.1 U2.17 | length 23.6
  Top Layer w0.254: R14.1 61.787,53.761 62.205,54.178 v1(62.205,68.631) ; R14.1@61.061,53.497 cw(c61.697,52.86) 61.697,53.761 cw(c61.697,54.661) R14.1@61.061,54.024 ; v1(66.396,68.631) 66.611,68.846 U2.17
  Bottom Layer w0.254: v1(62.205,68.631) v1(66.396,68.631)
RESET: P_YJ1.5 U2.42 | length 18.9
  Top Layer w0.254: U2.42 67.611,81.178 73.381,86.948 P_YJ1.5 P_YJ1.5@73.381,90.78 ; P_YJ1.5@72.94,90.644 cw(c71.877,89.58) 73.381,89.58 cw(c74.885,89.58) P_YJ1.5@73.821,90.644 ; P_YJ1.5@73.12,90.823 cw(c72.49,90.194) 73.381,90.194 cw(c74.271,90.194) P_YJ1.5@73.642,90.823
RET: P_YJ1.6 U2.41 | length 15.8
  Top Layer w0.254: U2.41 68.111,80.836 68.25,80.975 75.921,88.646 P_YJ1.6 P_YJ1.6@76.048,90.957
RST: C9.1 R7.1 U2.7 | length 17
  Top Layer w0.254: v1(56.363,79.121) 56.363,79.07 61.108,74.324 U2.7 ; v1(58.475,81.132) 59.426,82.083 C9.1
  Bottom Layer w0.254: v1(56.363,79.121) 56.363,79.146 58.348,81.132 v1(58.475,81.132)
RXD: P1.4 P1.5 P1.6 U1.3 | length 25
  Top Layer w0.254: U1.3 v1(94.717,77.216) ; U1.3@93.572,77.09 cw(c93.876,76.787) 93.876,77.216 cw(c93.876,77.645) U1.3@93.572,77.342 ; v1@94.627,77.126 ccw(c94.41,76.909) 94.41,77.216 ccw(c94.41,77.523) v1@94.627,77.306
  Top Layer w0.635: P1.6 P1.5 P1.4
  Bottom Layer w0.254: v1@94.627,77.126 cw(c94.349,76.848) 94.742,76.848 ; v1(94.717,77.216) 94.742,77.191 94.742,63.271 P1.4
RXD1: P1.15 U2.31 | length 49.6
  Top Layer w0.254: U2.31 74.705,74.824 75.413,74.117 75.413,60.681 76.276,59.817 100.203,59.817 101.6,58.42 P1.15
  Bottom Layer w0.254: P1.15 P1.15@101.6,54.153
RXD2: P1.14 P3.1 U2.13 | length 66.7
  Top Layer w0.254: U2.13 64.611,68.714 65.786,67.539 v1(65.786,56.693) ; v1(71.374,56.744) 97.638,56.744 99.06,55.321 P1.14
  Bottom Layer w0.254: v1(65.786,56.693) 71.323,56.693 v1(71.374,56.744) ; P1.14 99.06,57.023 99.771,57.734 107.137,57.734 P3.1
SCK: P_YJ1.3 U2.45 | length 15.3
  Top Layer w0.254: U2.45 66.111,87.371 68.478,89.738 68.478,90.907 P_YJ1.3 ; P_YJ1.3@68.04,90.823 cw(c66.981,89.765) 68.478,89.765 ; 68.478,90.009 cw(c69.376,90.009) P_YJ1.3@68.741,90.644
SDA: P_YJ1.4 U2.43 | length 14.6
  Top Layer w0.254: U2.43 67.111,81.636 71.603,86.127 71.603,90.094 70.841,90.856 P_YJ1.4
SWCLK: P5.2 U2.37 | length 21.6
  Top Layer w0.254: U2.37 70.111,81.592 80.289,91.77 82.118,91.77 82.855,92.507 P5.2
SWDIO: P5.3 U2.34 | length 28.2
  Top Layer w0.254: v1(69.85,75.997) 70.178,76.324 U2.34 ; v1(71.247,79.477) 71.247,81.712 80.518,90.983 84.023,90.983 85.395,92.354 P5.3
  Bottom Layer w0.254: v1(69.85,75.997) 71.247,77.394 v1(71.247,79.477)
TXD: D2.1 P1.1 P1.2 P1.3 | length 33.1
  Top Layer w0.254: D2.1 v2(91.44,83.236)
  Top Layer w0.635: P1.3 P1.2 P1.1
  Bottom Layer w0.254: v2@91.44,83.109 91.618,83.287 93.142,83.287 95.631,80.797 95.631,68.936 95.631,65.38 99.06,61.951 P1.3
TXD1: P1.12 U2.30 | length 39
  Top Layer w0.254: U2.30 74.012,74.324 74.727,73.609 74.727,59.995 75.844,58.877 v2(83.388,58.877)
  Bottom Layer w0.254: v2(83.388,58.877) 88.976,58.877 P1.12
TXD2: P1.11 P3.2 U2.12 | length 69.9
  Top Layer w0.254: U2.12 63.261,68.616 64.618,67.259 v1(64.618,55.499) ; v1(70.815,55.423) 89.891,55.423 P1.11 ; v1@70.905,55.333 cw(c71.122,55.116) 71.122,55.423 cw(c71.122,55.729) v1@70.905,55.513
  Bottom Layer w0.254: v1(64.618,55.499) v1@70.739,55.499 ; P1.11 91.44,52.781 91.897,52.324 94.691,52.324 95.199,52.832 95.199,57.76 96.545,59.106 105.969,59.106 P3.2
WS: R13.2 U2.46 U4.2 | length 23.4
  Top Layer w0.254: U4.2 51.706,80.17 R13.2 ; R13.2@54.005,79.907 ccw(c53.368,79.27) 53.368,80.17 ccw(c53.368,81.071) R13.2@54.005,80.434 ; v1(64.948,82.144) 65.611,81.481 U2.46
  Bottom Layer w0.254: U4.2 52.019,82.144 v1(64.948,82.144)
pads on no net: J1. J1.4 RL1.2 RL1.6 U1.9 U1.10 U1.11 U1.12 U1.13 U1.14 U1.15 U2.1 U2.6 U2.15 U2.16 U2.25 U2.26 U2.27 U2.28 U2.29 U2.32 U2.33 U2.38 U2.39 U2.40 U3.2 U3.4 U3.5 U3.6 U3.7 U3.9 U3.11 U3.13 U3.17 U3.19 U3.20 U4.3
copper on no net:
  other v3: 110.27,82.112 110.27,86.112

## Polygon pours and split planes (outlines as drawn)
GND on Top Layer "Top Layer-No Net" (solid, remove dead copper, pour order 1000): 28.575,100.355 28.296,100.076 28.296,18.974 123.292,18.974 123.8,19.482 123.266,20.015 123.266,100.101 28.575,100.101
GND on Bottom Layer "Top Layer-No Net" (solid, remove dead copper, pour order 1001): 30.15,100.609 28.702,99.162 28.702,21.082 119.583,21.082 120.091,21.59 117.475,24.206 117.475,99.162 29.616,99.162 28.956,99.822

## Keep-outs
Keep-Out Layer:
  circle w0.254: c110.235,92.634 r1.5
  circle w0.254: c110.133,27.127 r1.5
  circle w0.254: c35.279,92.583 r1.5
  circle w0.254: c35.228,27.203 r1.5
  pour cut-out: 106.807,46.761 106.883,46.685 106.883,30.683 113.208,30.683 113.208,46.761
  lines w0.254: 34.442,96.749 ccw(c35.014,92.799) 31.064,92.227 31.064,28.473 ccw(c36.373,28.346) 36.246,23.038 110.744,23.038 ccw(c109.525,28.829) 115.316,30.048 115.341,30.074 115.341,79.426 114.554,80.213 114.554,87.986 115.316,88.748 115.316,93.37 ccw(c111.709,93.116) 111.455,96.723 34.468,96.723 ; 106.883,30.683 106.883,46.685 106.883,30.683 ; 106.883,30.683 113.208,30.683 113.208,46.761 ; 113.208,46.761 106.807,46.761 113.208,46.761

## Silkscreen, mask and mechanical layers (free items; w line width, h text height)
Top Overlay:
  drawing of 651 lines, arcs and shapes, not listed
  text "3.3V" at 87.452,92.354 h1.52 r270
  text "GND" at 79.803,92.256 h1.52 r270
  text "SWCLK" at 82.296,92.227 h1.52 r270
  text "SWDIO" at 84.811,92.177 h1.52 r270
  text "5V" at 43.586,89.383 h1.52 r90
  text "PC14" at 51.029,89.129 h1.02 r90
  text "PD0" at 46.05,89.103 h1.02 r90
  text "PC15" at 48.514,89.103 h1.02 r90
  text "PC13" at 53.518,89.078 h1.02 r90
  text "GND" at 40.97,88.976 h1.27 r90
  text "技术QQ:2067054198" at 62.332,85.573 h2
  text "下载" at 106.096,75.133 h2.03
  text "P1" at 62.179,52.603 h1.52
  text "P3" at 78.054,52.375 h1.52
  text "USB" at 73.025,50.851 h1.27
  text "USB" at 67.132,50.825 h1.27
  text "TxD" at 72.822,48.92 h1.52
  text "RxD" at 67.132,48.87 h1.52
  text "拉低" at 65.126,48.819 h1.27 r90
  text "拉低" at 63.195,48.793 h1.27 r90
  text "TxD2" at 78.969,48.616 h1.27 r90
  text "RxD2" at 81.356,48.514 h1.27 r90
  text "TxD1" at 68.656,44.094 h1.27 r90
  text "RxD2" at 72.517,44.069 h1.27 r90
  text "RxD1" at 74.447,44.069 h1.27 r90
  text "TxD2" at 66.853,44.044 h1.27 r90
  text "E_Txd" at 70.51,43.764 h1.52 r90
  text "GPIO0" at 64.999,43.739 h1.27 r90
  text "E_Txd" at 81.407,43.688 h1.52 r90
  text "E_Rxd" at 79.045,43.637 h1.52 r90
  text "GPIO15" at 63.144,43.612 h1.27 r90
  text "E_Rxd" at 76.606,43.612 h1.52 r90
  text "STM32&ESP8266开发板" at 63.678,24.333 h2
  text "LWESP_ReV1.2" at 93.015,24.257 h2
Bottom Overlay:
  drawing of 1495 lines, arcs and shapes, not listed
  text "扫码进店" at 76.911,43.79 h3

## Text inside footprints (layer, text, board x,y; h text height)
C1: Mechanical 11 "2" at 101.625,80.137 h0.64 r270; Mechanical 11 "1" at 101.625,81.534 h0.64 r270
C2: Mechanical 11 "2" at 103.429,80.162 h0.64 r270; Mechanical 11 "1" at 103.429,81.559 h0.64 r270
C3: Mechanical 11 "2" at 87.046,79.985 h0.64 r90; Mechanical 11 "1" at 87.046,78.588 h0.64 r90
C4: Mechanical 11 "2" at 100.762,88.316 h0.64 r270; Mechanical 11 "1" at 100.762,89.713 h0.64 r270
C5: Mechanical 11 "2" at 90.602,89.256 h0.64 r90; Mechanical 11 "1" at 90.602,87.859 h0.64 r90
C6: Mechanical 11 "2" at 78.664,74.168 h0.64 r270; Mechanical 11 "1" at 78.664,75.565 h0.64 r270
C7: Mechanical 11 "2" at 78.664,68.453 h0.64 r90; Mechanical 11 "1" at 78.664,67.056 h0.64 r90
C8: Mechanical 11 "2" at 107.848,50.063 h0.64; Mechanical 11 "1" at 106.451,50.063 h0.64
C9: Mechanical 11 "2" at 60.569,85.841 h0.64; Mechanical 11 "1" at 59.172,85.841 h0.64
C10: Mechanical 11 "2" at 84.633,48.26 h0.64 r180; Mechanical 11 "1" at 86.03,48.26 h0.64 r180
C11: Mechanical 11 "2" at 84.633,46.304 h0.64 r180; Mechanical 11 "1" at 86.03,46.304 h0.64 r180
C12: Mechanical 11 "2" at 71.806,65.1 h0.64; Mechanical 11 "1" at 70.409,65.1 h0.64
C13: Mechanical 11 "2" at 64.77,83.871 h0.64; Mechanical 11 "1" at 63.373,83.871 h0.64
C14: Mechanical 11 "2" at 76.352,77.241 h0.64 r270; Mechanical 11 "1" at 76.352,78.638 h0.64 r270
C15: Mechanical 11 "2" at 56.312,75.159 h0.64 r90; Mechanical 11 "1" at 56.312,73.762 h0.64 r90